# Altium PCB main.PcbDoc
Units mil, origin at the board's own origin, x right, y up, seen from the top; angles counter-clockwise.
Board outline 755.97 x 946.03 mil, 2 copper layers (Top Layer, Bottom Layer); 8 components, 7 nets, 32 pads, 2 vias.
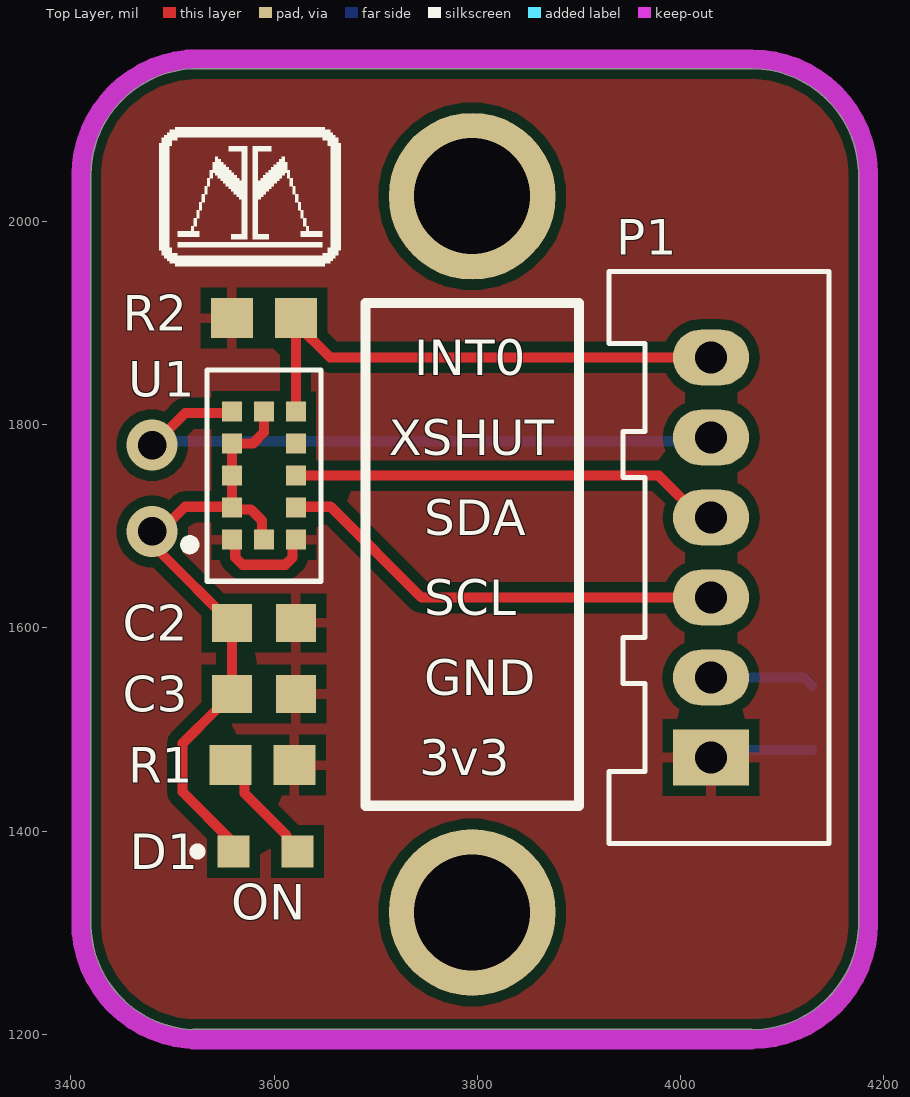
[diagram p0: Top Layer view]
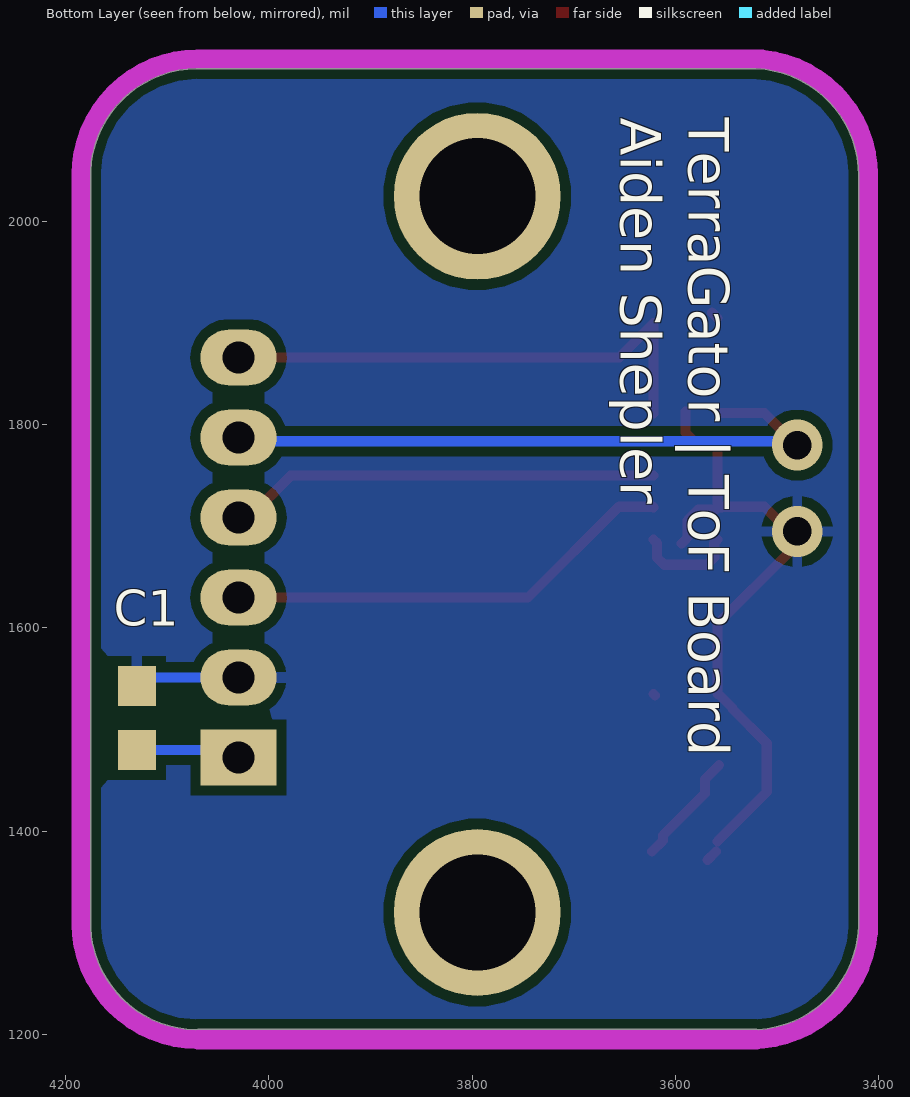
[diagram p1: Bottom Layer view, seen from below]

## Layer stack, top to bottom
Top Solder: solder mask 0.4, Solder Resist, Dk 3.5
Top Layer: signal copper 1.4
Dielectric 1: dielectric 12.6, FR-4, Dk 4.8
Bottom Layer: signal copper 1.4
Bottom Solder: solder mask 0.4, Solder Resist, Dk 3.5

## Board outline
3419.51,1305.32 ccw(c3525,1310.11) 3518.38,1204.72 3520,1204.86 4070,1204.86 4072.47,1204.54 ccw(c4070,1310.11) 4175.48,1305.32 4175.48,2049.59 ccw(c4070,2045) 4071.32,2150.58 4070,2150.49 3520.32,2150.49 ccw(c3525.11,2045) 3419.51,2045

## Design rules (kind name [scope] priority, off if disabled: settings)
Clearance [All] p1: gap=10 ignorepadtopadclearanceinfootprint=FALSE
PolygonConnect [All] p1: connectstyle=Relief reliefconductorwidth=10 reliefentries=4 polygonreliefangle="90 Angle" airgapwidth=10
RoutingVias [All] p1: holewidth=28 width=50 viastyle="Through Hole" minholewidth=28 minwidth=50 maxholewidth=28 maxwidth=50
SolderMaskExpansion [All] p1: expansion=4 istentingtop=FALSE
SupplyNets "Schematic Supply Nets_1" [InNet('3V3')] p1: voltage=0.000
SupplyNets "Schematic Supply Nets" [InNet('GND')] p2: voltage=0.000
Width [All] p1: maxlimit=10 minlimit=10 preferedwidth=10
30 further rules are at their usual default settings.

## Classes and differential pairs
component class main: C1 C2 C3 D1 P1 R1 R2

## Components (designator, comment, footprint, x,y, rotation, side; value= is the part's Value field where it differs from the comment)
C1 "Cap" CAPC0603 4130,1511.5 r90 bottom value=100nF
C2 "Cap" CAPC0603 3590,1605 r180 top value=100nF
C3 "Cap" CAPC0603 3590,1535 r180 top value=4.7uF
D1 "0603 LED" "0603 (LED)" 3591.5,1380 r0 top
P1 "MOLEX-HDR-1x6-SHERLOCK_VERT" MOLEX-HDR-1X6-SHERLOCK-VERT 4030,1472.52 r270 top
R1 "Res" RES0603 3588.5,1465 r180 top value=220
R2 "Res" RES0603 3590,1905 r0 top value=10k
U1 "VL53L1CXV0FY/1" "LGA-12 (VL53L1CXV0FY/1)" 3590,1750 r180 top

## Footprints (in the part's own frame and the unit in brackets; to place one, negate y for a bottom-side part, rotate by r counter-clockwise, add the part's x,y. Pads: shape width x height; smd on the part's side, far side on the other; paste and mask are expansions set on the pad)
"0603 (LED)" [mm] "0603 package for LED"
  rect 0.8x0.8 smd: A(0.8,0) C(-0.8,0)
  silkscreen extent -1.8,-0.1 -1.6,0.1, body extent -0.8,-0.4 0.8,0.4, height 0.7
CAPC0603 [mm] "Chip Capacitor, 2-Leads, Body 1.60x0.80mm, IPC Medium Density"
  rect 1x0.95 smd: 1(-0.8,0) 2(0.8,0)
  body extent -0.88,-0.48 0.87,0.48, height 0.8
"LGA-12 (VL53L1CXV0FY/1)" [mm] "12 pin LGA for 4.9 x 2.5 x 1.56 mm package"
  rect 0.5x0.5 smd: 1(0.8,1.6) 2(0.8,0.8) 3(0.8,0) 4(0.8,-0.8) 5(0.8,-1.6) 6(0,-1.6) 7(-0.8,-1.6) 8(-0.8,-0.8) 9(-0.8,0) 10(-0.8,0.8) 11(-0.8,1.6) 12(0,1.6)
  silkscreen extent -1.42,-2.64 1.97,2.64, body extent -1.25,-2.45 1.25,2.45, height 1.6
MOLEX-HDR-1X6-SHERLOCK-VERT [mm]
  rect 1.397x1.905 hole 0.8: 1(0,0)
  oval 1.397x1.905 hole 0.8: 2(-2,0) 3(-4,0) 4(-6,0) 5(-8,0) 6(-10,0)
  silkscreen extent -12.15,-2.55 2.15,2.95, body extent -12.17,-2.62 2.13,2.93, height 8.5
RES0603 [mm] "Chip Resistor, 2-Leads, Body 1.60x0.80mm, IPC Medium Density"
  rect 1.05x1 smd: 1(-0.8,0) 2(0.8,0)
  body extent -0.88,-0.48 0.87,0.47, height 0.8

## Part data
C1 C2 C3: Supplier Part Number 1=1276-1000-1-ND, Supplier 1=Digi-Key
D1: "150060SS75000"
P1: "Header, Molex, 2mm Pitch Sherlock Header, Single Row, Vertical, 6 Circuits, Length 3.3mm, 0353620650"
R1 R2: "SMD, RES0603", Supplier Part Number 1=RMCF0603JT10K0CT-ND, Supplier 1=Digi-Key
U1: "ToF Optical Sensor 157.480 (4m) I²C Output from STMelectronics", Package="LGA-12 STMicroelectronics", Availability="In Stock", Check_prices=https://www.snapeda.com/parts/VL53L1CXV0FY/1/STMicroelectronics/view-part/?ref=eda, MF=STMicroelectronics, MP=VL53L1CXV0FY/1, Price=None, Purchase-URL=https://pricing.snapeda.com/search/part/VL53L1CXV0FY/1/?ref=eda, SnapEDA_Link=https://www.snapeda.com/parts/VL53L1CXV0FY/1/STMicroelectronics/view-part/?ref=snap

## Free pads (board coordinates)
  round 164.17 hole 114.17: 1(3795,1320) 1(3795,2025)

## Via types
v1: diameter 50, hole 28, Top Layer to Bottom Layer, 2 vias

## Nets (pads, with @x,y where several pads share a name; then routed paths per layer and width w, separated by ;. In a path a pad name is that pad's centre, name@x,y a point inside that pad or via, vN(x,y) a via of type N, cw(c..) or ccw(c..) an arc to the next point about the centre after c; other vN are vias at no path point)
3V3: C1.1 C2.1 C3.1 P1.1 R1.1 R2.1 U1.1 U1.11 | length 223.2
  Top Layer w10: U1.1 3561.75,1683.77 3561.75,1669.35 3568.93,1662.17 3611.07,1662.17 3618.25,1669.35 3618.25,1683.77 U1.11 ; R2.1 R2.1@3563.83,1910.32 ; C3.1@3620,1533.5 C3.1 ; P1.1 P1.1@4040,1472.52
  Bottom Layer w10: P1.1 4037.48,1480 C1.1
GND: C1.2 C2.2 C3.2 D1.C P1.2 U1.2 U1.3 U1.4 U1.6 U1.12 | length 761.7
  Top Layer w10: D1.C@3558.5,1390 3510,1438.5 3510,1486.5 3543.82,1520.31 3543.82,1521.3 3557.52,1535 C3.2 3558.5,1604.02 3487.65,1674.87 3487.65,1687.35 v1(3480,1695) 3488.06,1695 3512.32,1719.25 3553.66,1719.25 3554.41,1718.5 U1.2 ; D1.C D1.C@3568.25,1371.75 ; U1.6 3590,1792.35 3579.14,1781.5 U1.4 U1.3 U1.2 ; U1.12@3593.8,1683.21 U1.12 3588.02,1688.99 3588.02,1705.93 3577.42,1716.53 3560.48,1716.53 U1.2
  Bottom Layer w10: P1.2 4121.73,1551.26 C1.2
INT0: P1.6 R2.2 U1.7 | length 511.5
  Top Layer w10: U1.7@3621.5,1810.98 3621.5,1900 3655.28,1866.22 P1.6
NetD1_A: D1.A R1.2 | length 112.3
  Top Layer w10: R1.2 3570.84,1451.17 3570.84,1437.27 3612.24,1395.87 3612.24,1390.75 D1.A
SCL: P1.3 U1.10 | length 445.9
  Top Layer w10: U1.10 3622.36,1719.37 3655.63,1719.37 3745,1630 P1.3
SDA: P1.4 U1.9 | length 425.6
  Top Layer w10: U1.9 3978.74,1750 4020,1708.74 P1.4
XSHUT: P1.5 U1.5 | length 645.3
  Top Layer w10: v1(3480,1780) 3480.82,1780 3512.32,1811.5 3557.01,1811.5 U1.5
  Bottom Layer w10: v1(3480,1780) 3483.74,1783.74 4026.26,1783.74 P1.5
pads on no net: U1.8

## Polygon pours and split planes (outlines as drawn)
GND on Bottom Layer "GND" (solid, pour order 1): 3419.51,1305.32 ccw(c3525,1310.11) 3518.38,1204.72 3520,1204.86 4070,1204.86 4072.47,1204.54 ccw(c4070,1310.11) 4175.48,1305.32 4175.48,2049.59 ccw(c4070,2045) 4071.32,2150.58 4070,2150.49 3520.32,2150.49 ccw(c3525.11,2045) 3419.51,2045
3V3 on Top Layer "3v3" (solid, pour order 0): 3419.51,1305.32 ccw(c3525,1310.11) 3518.38,1204.72 3520,1204.86 4070,1204.86 4072.47,1204.54 ccw(c4070,1310.11) 4175.48,1305.32 4175.48,2049.59 ccw(c4070,2045) 4071.32,2150.58 4070,2150.49 3520.32,2150.49 ccw(c3525.11,2045) 3419.51,2045

## Keep-outs
Keep-Out Layer:
  lines w19: 3409.89,1310.11 ccw(c3525,1310.11) 3525,1195 ; 3410,1300 3410,2050 ; 3410,2045 cw(c3525.11,2045) 3525.11,2160.11 ; 3515,2160 4070,2160 ; 4070,1195 ccw(c4070,1310.11) 4185.11,1310.11 ; 4070,2160.1 cw(c4070,2045) 4185.1,2045 ; 4185,1305 4185,2050
  lines w19.68: 3520,1195 4070,1195

## Silkscreen, mask and mechanical layers (free items; w line width, h text height)
Top Overlay:
  drawing of 22 lines, arcs and shapes, not listed
  text "INT0" at 3738,1848.73 h35
  text "XSHUT" at 3713,1769.99 h35
  text "SDA" at 3748,1691.25 h35
  text "SCL" at 3748,1612.51 h35
  text "GND" at 3748,1533.77 h35
  text "3v3" at 3743,1455.03 h35
  text "ON" at 3558,1313 h35
Bottom Overlay:
  text "TerraGator | ToF Board" at 3587,2102 h40 r90
  text "Aiden Shepler" at 3653.67,2102 h40 r90